# Altium PCB c2020_pcb.PcbDoc
Units mm, origin at the board's own origin, x right, y up, seen from the top; angles counter-clockwise.
Board outline 115.86 x 159.06 mm, 2 copper layers (Top Layer, Bottom Layer); 34 components, 52 nets, 174 pads, 284 vias.
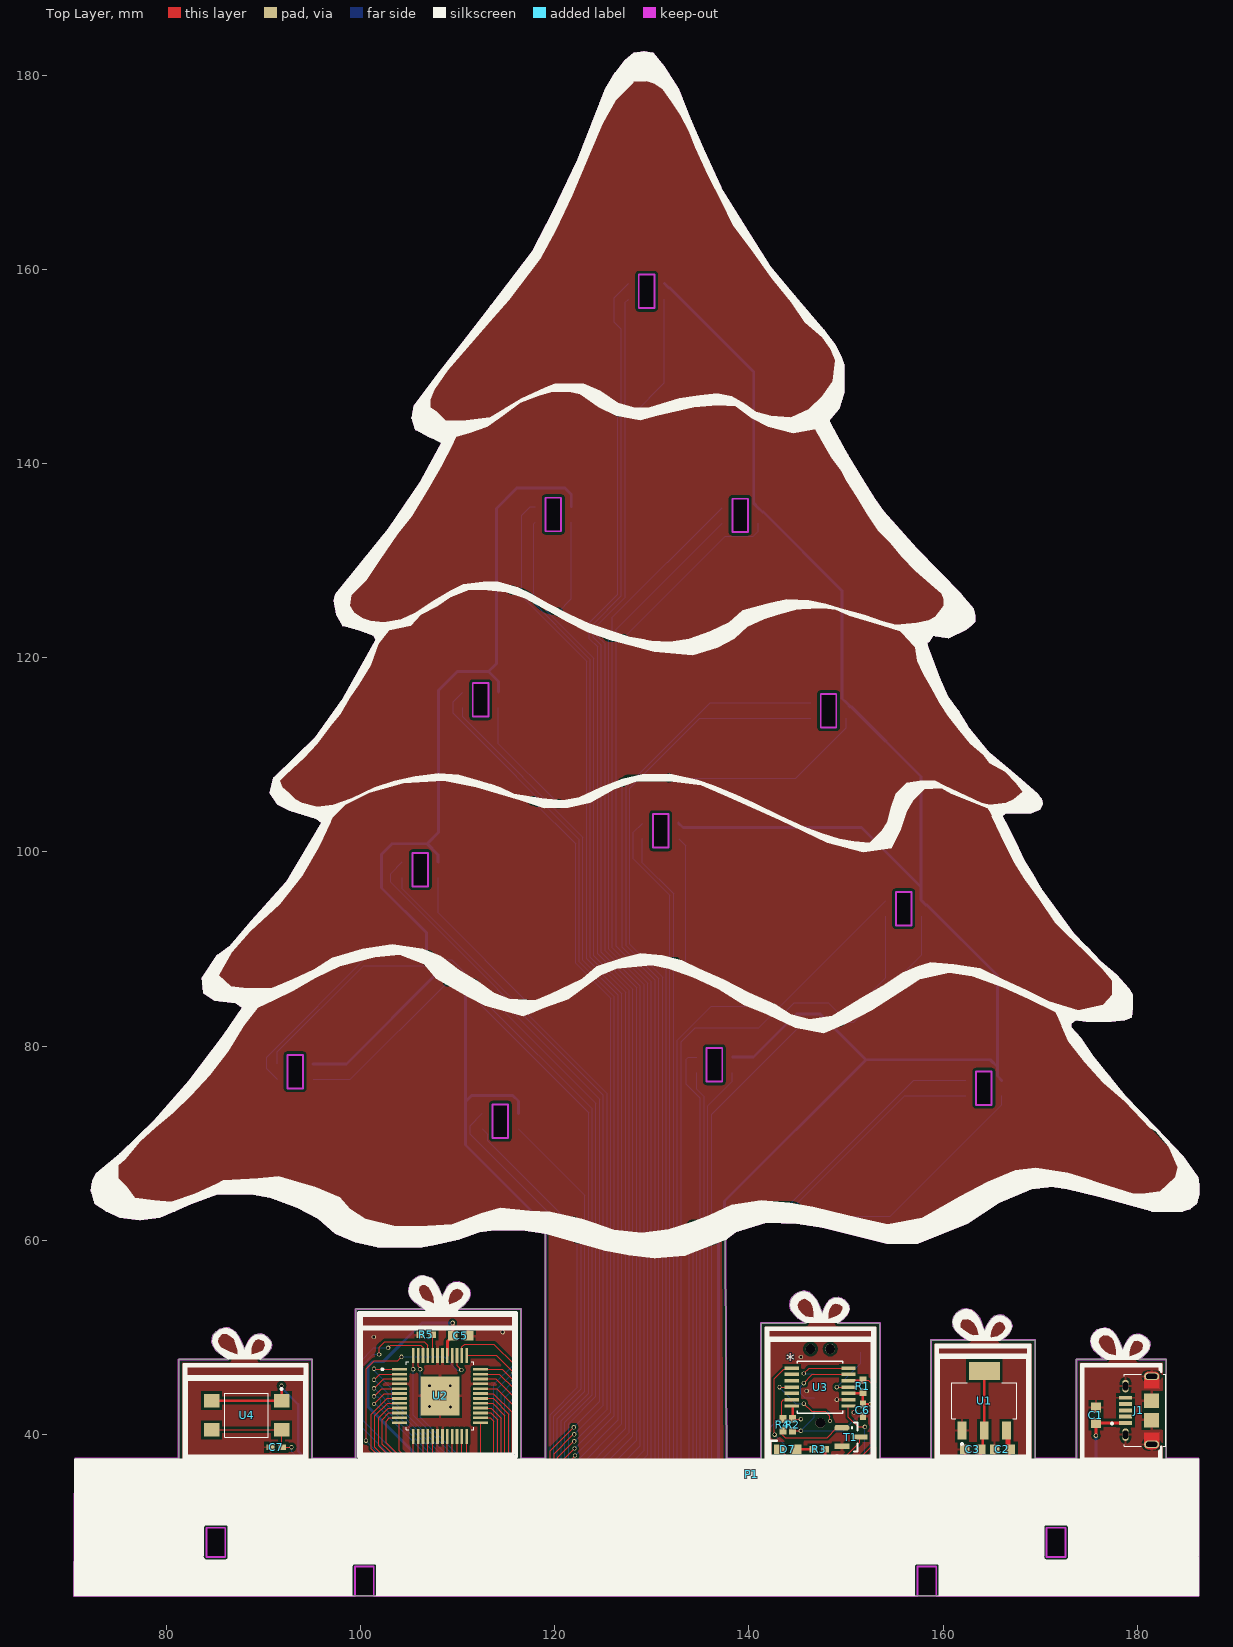
[diagram p0: Top Layer view]
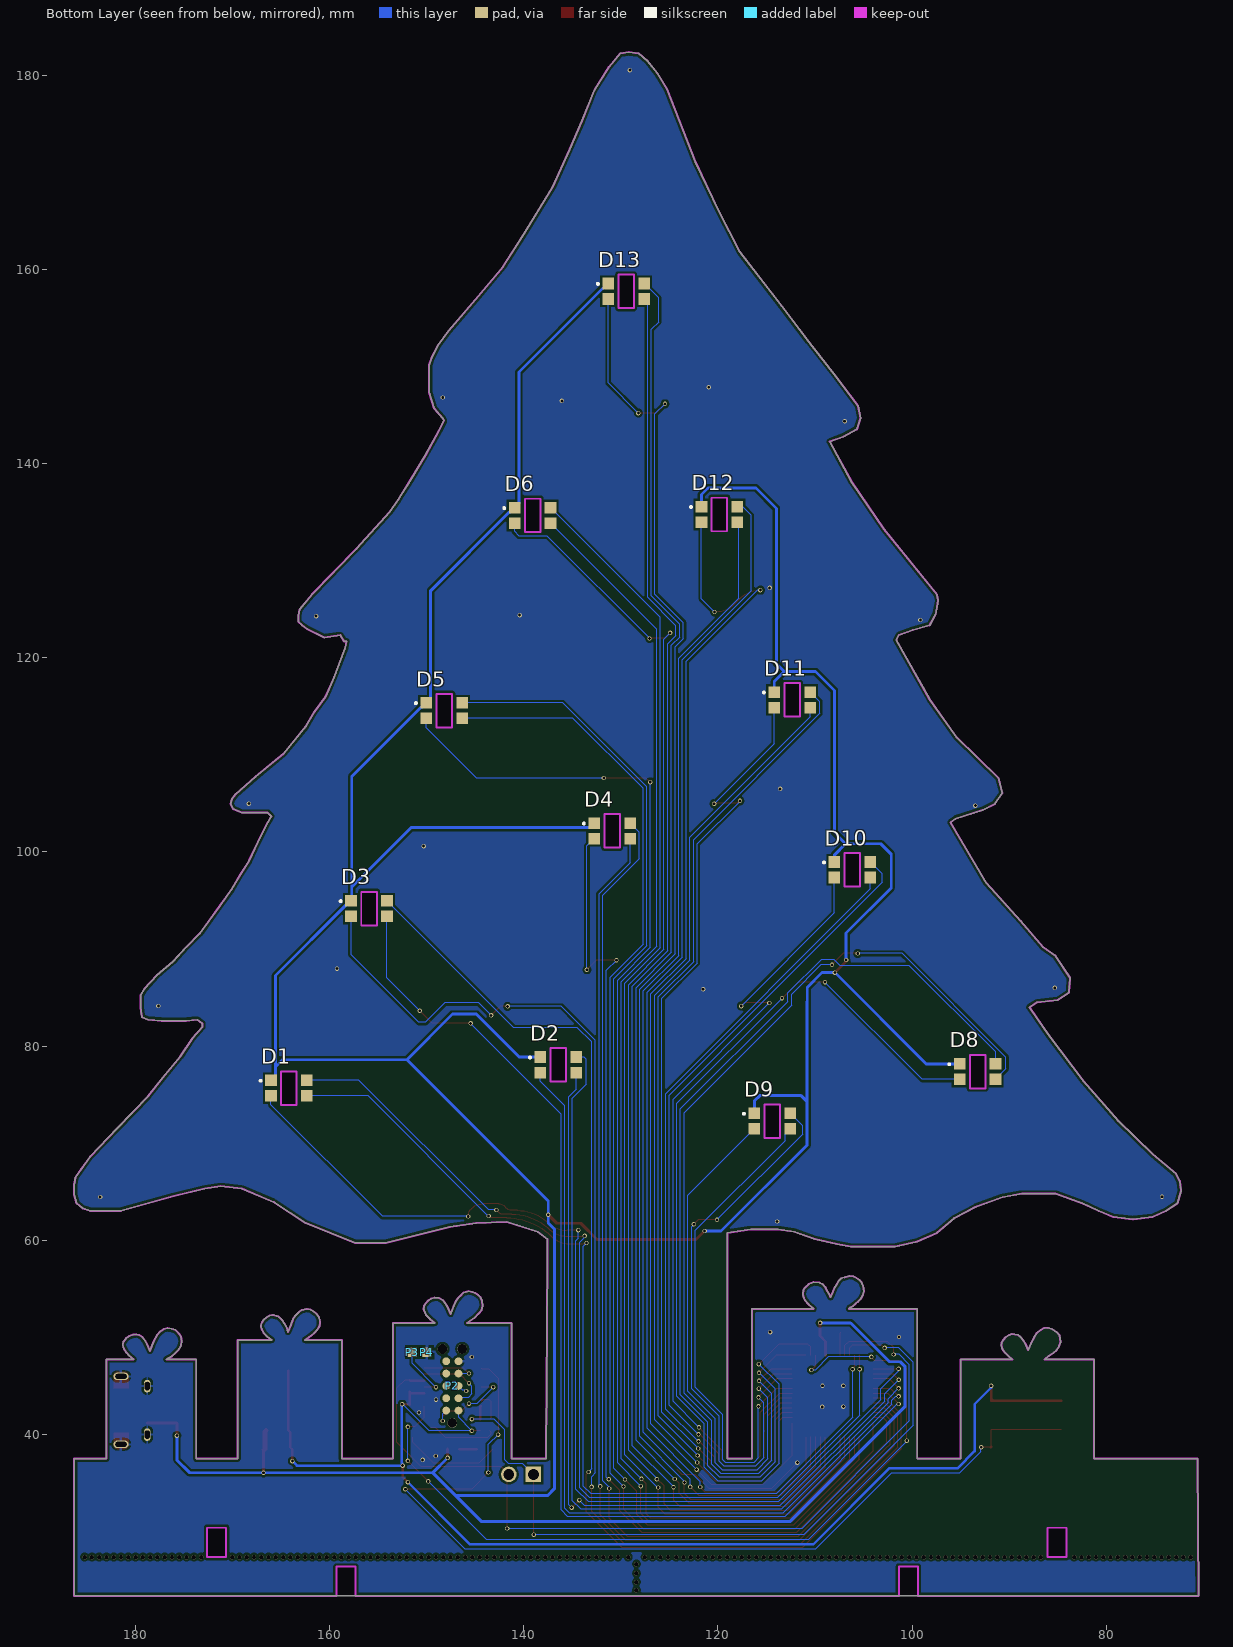
[diagram p1: Bottom Layer view, seen from below]
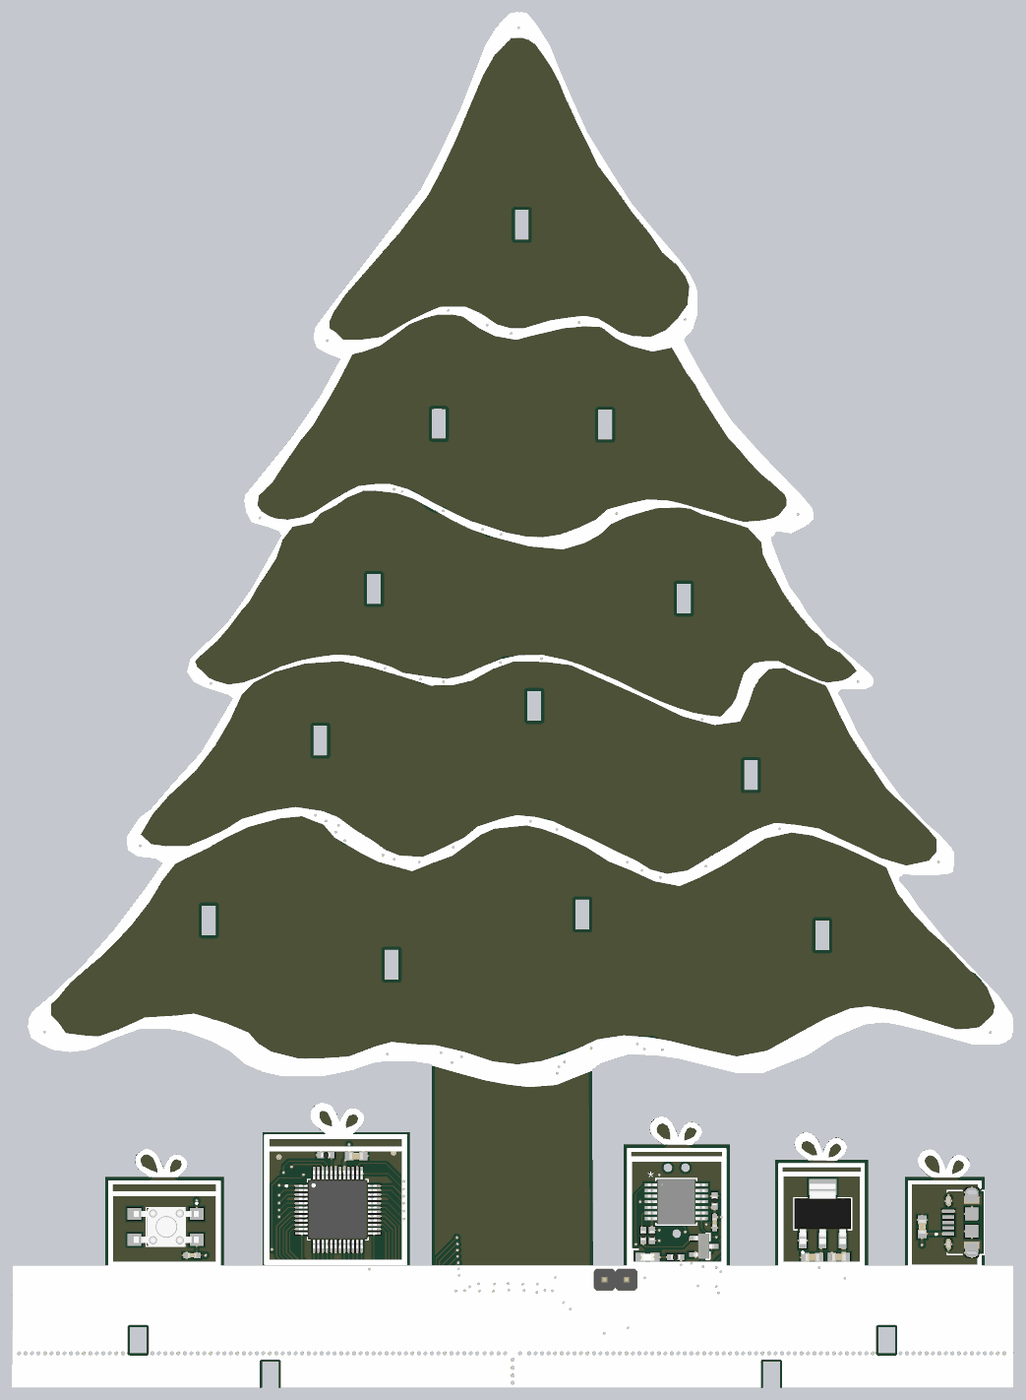
[diagram p2: 3D render of the assembled board from above, using the file's embedded part models]

## Layer stack, top to bottom
Top Solder: solder mask 0.0102, Solder Resist, Dk 3.5
Top Layer: signal copper 0.0356
Dielectric 1: dielectric 0.32, FR-4, Dk 4.8
Bottom Layer: signal copper 0.0356
Bottom Solder: solder mask 0.0102, Solder Resist, Dk 3.5

## Board outline
355 vertices, not listed, extent 70.474,23.35 186.336,182.407
cut-out: 157.35,23.35 159.3,23.35 159.3,26.375 157.35,26.375
cut-out: 99.4,23.35 101.35,23.35 101.35,26.375 99.4,26.375
cut-out: 84.1,27.35 86.05,27.35 86.05,30.375 84.1,30.375
cut-out: 170.675,27.35 172.625,27.35 172.625,30.375 170.675,30.375
cut-out: 170.675,27.35

## Design rules (kind name [scope] priority, off if disabled: settings)
Clearance [All] p1: gap=0.254 ignorepadtopadclearanceinfootprint=TRUE except(0: Arc-Hole Track-Hole SMDPad-Hole THPad-Hole Via-Hole Fill-Hole Poly-Hole Region-Hole Text-Hole; 0.127: SMDPad-SMDPad; 0.2: Arc-SMDPad Track-SMDPad)
PolygonConnect [All] p1: thpad.connectstyle=Relief thpad.reliefconductorwidth=0.254 thpad.reliefentries=4 thpad.polygonreliefangle="90 Angle" thpad.airgapwidth=0.254 smdpad.connectstyle=Relief smdpad.reliefconductorwidth=0.254 smdpad.reliefentries=4 smdpad.polygonreliefangle="90 Angle" smdpad.airgapwidth=0.254 via.connectstyle=Direct via.reliefconductorwidth=0.254 via.reliefentries=4 via.polygonreliefangle="90 Angle" via.airgapwidth=0.254
RoutingVias [All] p1: holewidth=0.3 width=0.45 viastyle="Through Hole" minholewidth=0.3 minwidth=0.45 maxholewidth=6 maxwidth=6
ShortCircuit ShortCircuit_1 [All] p1: allowed=FALSE
ShortCircuit [All] p2: allowed=FALSE
SolderMaskExpansion [All] p1: expansion=0.102
Width [All] p1: maxlimit=5 minlimit=0.127 preferedwidth=0.127 minimp=50.000000 maximp=50.000000 favimp=50.000000
29 further rules are at their usual default settings.

## Components (designator, comment, footprint, x,y, rotation, side; value= is the part's Value field where it differs from the comment)
C1 "1uF" "CAP_0603i_1608m -N" 175.75,41.966 r270 top
C2 "1uF" "CAP_0603i_1608m -N" 166.125,38.466 r0 top
C3 "1uF" "CAP_0603i_1608m -N" 163.05,38.441 r0 top
C5 "1uF" "CAP_0603i_1608m -N" 110.3,50.15 r180 top
C6 "100nF" "CAP_0402i_1005m -N" 151.75,42.466 r90 top
C7 "100nF" "CAP_0402i_1005m -N" 91.3,38.666 r0 top
D1 "156120M173000" LED_156120M173000 164.2,75.666 r180 bottom
D2 "156120M173000" LED_156120M173000 136.45,78.066 r180 bottom
D3 "156120M173000" LED_156120M173000 155.95,94.166 r180 bottom
D4 "156120M173000" LED_156120M173000 130.9,102.166 r180 bottom
D5 "156120M173000" LED_156120M173000 148.2,114.566 r180 bottom
D6 "156120M173000" LED_156120M173000 139.1,134.666 r180 bottom
D7 "Grün" *0603 144,38.466 r0 top
D8 "156120M173000" LED_156120M173000 93.25,77.366 r180 bottom
D9 "156120M173000" LED_156120M173000 114.4,72.266 r180 bottom
D10 "156120M173000" LED_156120M173000 106.15,98.166 r180 bottom
D11 "156120M173000" LED_156120M173000 112.35,115.666 r180 bottom
D12 "156120M173000" LED_156120M173000 119.85,134.766 r180 bottom
D13 "156120M173000" LED_156120M173000 129.45,157.766 r180 bottom
J1 "10118194-0001LF" AMPHENOL_10118194-0001LF 181.5,42.466 r90 top
P1 "I2C_TESTPIN" HDR1X2 139.01,35.866 r0 top
P2 "Tag-Connect TC2050-IDC-NL-No pin assigned" "TAG-CONNECT TC2050-IDC-NL 10-Pin" 146.73,42.446 r90 bottom
P3 "RCO_TESTPIN_1" Pad_0603 151.5,48.466 r180 bottom
P4 "RCO_TESTPIN" Pad_0603 150,48.466 r180 bottom
R1 "3k" "RES_0402i_1005m -N" 151.75,44.966 r270 top
R2 "3k" "RES_0402i_1005m -N" 144.5,40.966 r270 top
R3 "1.5k" "RES_0402i_1005m -N" 147.25,38.466 r0 top
R4 "200k" "RES_0402i_1005m -N" 143.5,40.966 r270 top
R5 "15k" "RES_0402i_1005m -N" 106.775,50.25 r0 top
T1 "BJT NPN" SOT23-N 150.5,39.716 r0 top
U1 "AZ1117EH-3.3TRG1" SOT230P700X180-4N 164.25,43.466 r90 top
U2 "IS31FL3236-QFLS2-TR" QFP50P900X900X160-48N 108.175,43.95 r0 top
U3 "STM32L011D4P6TR" TSSOP14 147.329,44.866 r0 top
U4 "TL3305AF260QG" SW_TL3305AF260QG 88.25,41.966 r270 top

## Footprints (in the part's own frame and the unit in brackets; to place one, negate y for a bottom-side part, rotate by r counter-clockwise, add the part's x,y. Pads: shape width x height; smd on the part's side, far side on the other; paste and mask are expansions set on the pad)
*0603 [mm]
  rect 1.1x1 smd: 1(-0.85,0) 2(0.85,0)
  silkscreen extent -1.78,-0.89 -1.14,0.89, body extent -0.8,-0.42 0.8,0.38, height 0.8
AMPHENOL_10118194-0001LF [mm]
  rect 0.4x1.35 smd: 1(-1.3,2.7) 2(-0.65,2.7) 3(0,2.7) 4(0.65,2.7) 5(1.3,2.7)
  oval 1.3x0.65 hole 0.55 slot 0.85 at 0 deg: S1(-2.5,2.7) S2(2.5,2.7)
  oval 0.775x1.55 hole 0.5 slot 1.15 at 90 deg: S3(-3.5,0) S6(3.5,0)
  rect 1.5x1.55 smd: S4(-1,0) S5(1,0)
  Top Layer region: 193 vertices and 0 holes, not listed, extent -4,-0.775 -2.3,0.78
  Top Layer region: 193 vertices and 0 holes, not listed, extent 2.3,-0.78 4,0.775
  silkscreen extent -3.7,-1.45 3.7,4.2
"CAP_0402i_1005m -N" [mm] "Chip Capacitor, Body 1.0x0.5mm, IPC Medium Density"
  rect 0.8x0.6 smd: 1(-0.6,0) 2(0.6,0)
  body extent -0.5,-0.25 0.5,0.25, height 0.5
"CAP_0603i_1608m -N" [mm] "Chip Capacitor, Body 1.6x0.8mm, IPC Medium Density"
  rect 1x1 smd: 1(-0.8,0) 2(0.8,0)
  body extent -0.8,-0.4 0.8,0.4, height 0.8
HDR1X2 [mm] "Connector; Header; 2 Position"
  rect 1.6x1.6 hole 1.1: 1(0,0)
  round 1.6 hole 1.1: 2(2.54,0)
  body extent -1.27,-1.27 3.81,1.27, height 10.3
LED_156120M173000 [mm]
  rect 1.2x1.2 smd: 1(-1.85,0.8) 2(-1.85,-0.8) 3(1.85,-0.8) 4(1.85,0.8)
  Keep-Out Layer board cut-out: -0.8,1.725 0.8,1.725 0.8,-1.725 -0.8,-1.725
  silkscreen extent -3.02,0.66 -2.82,0.86
Pad_0603 [mm]
  rect 1x1 smd: 1(0,0)
QFP50P900X900X160-48N [mm]
  rrect25% 1.56x0.28 smd: 1(-4.18,2.75) 2(-4.18,2.25) 3(-4.18,1.75) 4(-4.18,1.25) 5(-4.18,0.75) 6(-4.18,0.25) 7(-4.18,-0.25) 8(-4.18,-0.75) 9(-4.18,-1.25) 10(-4.18,-1.75) 11(-4.18,-2.25) 12(-4.18,-2.75) 25(4.18,-2.75) 26(4.18,-2.25) 27(4.18,-1.75) 28(4.18,-1.25) 29(4.18,-0.75) 30(4.18,-0.25) 31(4.18,0.25) 32(4.18,0.75) 33(4.18,1.25) 34(4.18,1.75) 35(4.18,2.25) 36(4.18,2.75)
  rrect25% 0.28x1.56 smd: 13(-2.75,-4.18) 14(-2.25,-4.18) 15(-1.75,-4.18) 16(-1.25,-4.18) 17(-0.75,-4.18) 18(-0.25,-4.18) 19(0.25,-4.18) 20(0.75,-4.18) 21(1.25,-4.18) 22(1.75,-4.18) 23(2.25,-4.18) 24(2.75,-4.18) 37(2.75,4.18) 38(2.25,4.18) 39(1.75,4.18) 40(1.25,4.18) 41(0.75,4.18) 42(0.25,4.18) 43(-0.25,4.18) 44(-0.75,4.18) 45(-1.25,4.18) 46(-1.75,4.18) 47(-2.25,4.18) 48(-2.75,4.18)
  rect 4x4 smd: 49(0,0)
  silkscreen extent -6.04,-3.5 3.5,3.5, body extent -4.5,-4.5 4.5,4.5, height 1.6
"RES_0402i_1005m -N" [mm] "Chip Resistor, Body 1.1x0.5mm, IPC Medium Density"
  rect 0.8x0.7 smd: 1(-0.6,0) 2(0.6,0)
  body extent -0.5,-0.25 0.5,0.25, height 0.3
SOT23-N [mm] "SOT23, 3-Leads, Body 3.0x2.6mm (max), Pitch 0.95mm, IPC Medium Density"
  oct 1.55x0.55 smd: 1(-0.925,0.95)
  rect 1.55x0.55 smd: 2(-0.925,-0.95) 3(0.925,0)
  silkscreen extent 0.13,-1.5 0.7,1.5, body extent -1.21,-1.45 1.21,1.45, height 0.98
SOT230P700X180-4N [mm]
  rect 1.86x0.9 smd: 1(-3.075,2.3) 2(-3.075,0) 3(-3.075,-2.3)
  rect 1.86x3.19 smd: 4(3.075,0)
  silkscreen extent -4.55,-3.35 1.85,3.35, body extent -3.48,-3.25 3.48,3.25, height 1.7
SW_TL3305AF260QG [mm]
  rect 1.4x1.6 smd: 1(-1.5,3.6) 2(-1.5,-3.6) 3(1.5,3.6) 4(1.5,-3.6)
  silkscreen extent -2.8,-2.25 2.25,3.7, body extent -2.25,-3.65 2.25,3.85, height 3.7
"TAG-CONNECT TC2050-IDC-NL 10-Pin" [mm] "Tag-Connect TC2050-IDC-NL 10-Pin No-Legs Cable with Ribbon connector."
  round 1 hole 1 unplated paste-2 mask+0: 0(-1.27,0.635) 0(6.35,-0.38) 0(6.35,1.65)
  round 0.8 smd paste-1 mask+0.102: 1(0,0) 2(1.27,0) 3(2.54,0) 4(3.81,0) 5(5.08,0) 6(5.08,1.27) 7(3.81,1.27) 8(2.54,1.27) 9(1.27,1.27) 10(0,1.27)
TSSOP14 [mil]
  rect 57.56x13.97 smd paste+0 mask+0: 1(-115,76.8) 2(-115,51.2) 3(-115,25.6) 4(-115,0) 5(-115,-25.6) 6(-115,-51.2) 7(-115,-76.8) 8(115,-76.8) 9(115,-51.2) 10(115,-25.6) 11(115,0) 12(115,25.6) 13(115,51.2) 14(115,76.8)
  silkscreen extent -93,-106 93,106, body extent -130,-101 130,101, height 47

## Part data
C1 C2 C3 C5 C6 C7: library part Cap, "capacitor"
D1 D2 D3 D4 D5 D6 D8 D9 D10 D11 D12 D13: "Red, Green, Blue (RGB) 624nm Red, 525nm Green, 470nm Blue LED Indication - Discrete 2V Red, 3.3V Green, 3.3V Blue 1206 (3216 Metric)", Package="1206 Wurth Electronics Inc.", Check_prices=https://www.snapeda.com/parts/156120M173000/Wurth%20Electronics%20Inc./view-part/3623792/?ref=eda, MF="Wurth Electronics", MP=156120M173000, Purchase-URL=https://pricing.snapeda.com/search/part/156120M173000/?ref=eda, SnapEDA_Link=https://www.snapeda.com/parts/156120M173000/Wurth%20Electronics%20Inc./view-part/3623792/?ref=snap
D7: library part LTST-C191KGKT, "LED; SMD; 0603; grün; 35mcd; 1.6x0.8x0.55mm; 130Â°; 2Ã·2.V; 20mA", Package="0603 Lite-On", Digi-Key_Part_Number=160-1446-1-ND, Digi-Key_Purchase_URL=https://www.digikey.ch/product-detail/de/lite-on-inc/LTST-C191KGKT/160-1446-1-ND/386834, MF="Lite-On Inc.", MP=LTST-C191KGKT, SnapEDA_Link=https://www.snapeda.com/parts/LTST-C191KFKT/Lite-On%20Inc./view-part/?ref=snap
J1: "USB - micro B USB 2.0 Receptacle Connector 5 Position Surface Mount, Right Angle; Through Hole", Package=None, Availability=Unavailable, MF="Amphenol ICC", MP=10118194-0001LF, Price=None, SnapEDA_Link=https://www.snapeda.com/parts/10118194-0001LF/Amphenol%20FCI/view-part/1413308/?ref=snap
P1: library part "Header 2", "Header, 2-Pin"
P2: "10-pin pogo pin programing port"
P3 P4: library part Pad, "Single Pad or Testpoint"
R1 R2 R3 R4 R5: library part Res, "Resistor"
T1: "NPN Bipolar Transistor", Note="Check footprint as it may  differ"
U1: "Linear Voltage Regulator IC 1 Output 1A SOT-223", Package="SOT-223 Diodes Inc.", Availability=Unavailable, MF="Diodes Inc.", MP=AZ1117EH-3.3TRG1, Price=None, SnapEDA_Link=https://www.snapeda.com/parts/AZ1117EH-3.3TRG1/Diodes%20Inc./view-part/482930/?ref=snap
U2: "LED Driver IC 36 Output Linear I²C Dimming 38mA 44-QFN (5x5)", Package="QFN-44 ISSI", Digi-Key_Part_Number=706-1434-1-ND, MF="ISSI, Integrated", MP=IS31FL3236-QFLS2-TR, SnapEDA_Link=https://www.snapeda.com/parts/IS31FL3236-QFLS2-TR/ISSI,%20Integrated%20Silicon%20Solution%20Inc/view-part/328010/?ref=snap
U3: "No Description Available", Built_By=EMA_UL_Team, Copyright="Copyright (C) 2018 Accelerated Designs. All rights reserved", Manufacturer_Part_Number=STM32L011D4P6TR, RefDes=RefDes, SourceLibrary=STMicroelectronics_2020-10-07, Type=DEV, Vendor=STMicroelectronics
U4: "Tactile Switch SPST-NO Top Actuated Surface Mount", Package="LQFP-48 E-Switch", Availability=Unavailable, MF=E-Switch, MP=TL3305AF260QG, Price=None, SnapEDA_Link=https://www.snapeda.com/parts/TL3305AF260QG/E-Switch/view-part/479903/?ref=snap

## Via types
v1: diameter 0.45, hole 0.45, Top Layer to Bottom Layer, tented both sides, 148 vias
v2: diameter 0.45, hole 0.3, Top Layer to Bottom Layer, tented both sides, 130 vias
v3: diameter 0.45, hole 0.3, Top Layer to Bottom Layer, 6 vias

## Nets (pads, with @x,y where several pads share a name; then routed paths per layer and width w, separated by ;. In a path a pad name is that pad's centre, name@x,y a point inside that pad or via, vN(x,y) a via of type N, cw(c..) or ccw(c..) an arc to the next point about the centre after c; other vN are vias at no path point)
+3.3: C3.2 C6.2 P2.1 R1.2 R2.2 U1.2 U1.4 U3.10 U4.1 U4.2 | length 125.9
  Top Layer w0.127: R2.2 v2(145.35,40.366)
  Top Layer w0.254: U4.2 U4.1 91.75,43.566 91.85,43.666 v2(91.85,45) ; U3.10 151.6,44.216 R1.2 C6.2 151.776,43.092 v2(152.532,43.092) ; v2(151.95,35.066) 152.482,35.598 v2(152.482,36.767) ; v2(163.85,37.241) C3.2 164.075,38.666 164.075,40.216 U1.2 U1.4
  Bottom Layer w0.127: P2.1 146.73,41.746 v2(145.35,40.366) 145.358,40.358 149.742,40.358 152.476,43.092 v2(152.532,43.092)
  Bottom Layer w0.254: v2(91.85,45) 91.85,44.8 93.55,43.1 93.55,38.266 95.325,36.491 102.36,36.491 110.185,28.666 145.55,28.666 v2(151.95,35.066) ; v2(152.532,43.092) v2(152.532,43.092) ; v2@152.556,42.96 152.556,37.015 152.52,36.979 152.52,36.804 v2(152.482,36.767) 163.376,36.767 v2(163.85,37.241)
+5: C1.2 C2.2 C5.2 D1.1 D2.1 D3.1 D4.1 D5.1 D6.1 D8.1 D9.1 D10.1 D11.1 D12.1 D13.1 J1.1 R3.2 U1.3 U2.41 | length 481.6
  Top Layer w0.3: v2(106.8,88.866) 106.8,88.716 v2(107.95,87.566) ; U2.41 108.925,49.575 C5.2 109.5,51.45 v2(109.475,51.475) ; v2(121.375,60.941) 122.25,60.066 132.465,60.066 134.14,61.741 136.604,61.741 v2(137.481,62.618) ; v2(147.85,37.566) R3.2 ; v2(166.825,36.035) 166.825,38.366 C2.2@166.875,38.416 ; v2(175.75,39.866) C1.2 J1.1
  Top Layer w0.5: U1.3 166.675,40.266 166.675,38.491 C2.2@166.75,38.416
  Bottom Layer w0.3: D8.1 98.55,78.166 v2(107.95,87.566) 109.275,87.566 110.8,86.041 110.8,84.616 110.807,84.608 110.807,74.257 ; v2(106.8,88.866) 106.8,91.641 102.15,96.291 102.15,99.766 103.225,100.841 106.85,100.841 ; D10.1 107.975,98.991 107.975,99.716 106.85,100.841 ; v2(109.475,51.475) 106.325,51.475 102.325,47.475 101.213,47.475 100.746,47.008 100.746,42.839 112.549,31.037 144.383,31.037 147.062,33.716 ; D11.1 114.2,117.55 113.165,118.585 ; D9.1 116.25,74.325 115.65,74.925 111.475,74.925 110.807,74.257 ; v2(121.375,60.941) 119.675,60.941 110.807,69.808 110.807,74.257 ; D12.1 121.7,136.825 121.025,137.5 116.084,137.5 113.979,135.395 113.979,119.399 113.165,118.585 ; D13.1 131.75,158.116 131.845,158.116 140.5,149.461 140.5,135.916 D6.1 141.4,135.016 141.495,135.016 149.6,126.911 149.6,115.816 D5.1 150.5,114.916 150.595,114.916 157.725,107.786 157.725,96.4 ; D4.1 133.2,102.516 151.609,102.516 157.725,96.4 ; D2.1 140.475,78.866 144.9,83.291 147.35,83.291 152.05,78.591 ; v2(147.85,37.566) 149.381,36.035 ; D1.1 165.6,76.916 165.6,77.85 ; v2(175.75,39.866) 175.75,37.366 174.419,36.035 v2(166.825,36.035) 149.381,36.035 ; 106.85,100.841 108,101.991 108,116.641 109.944,118.585 113.165,118.585 ; 147.062,33.716 149.381,36.035 ; 147.062,33.716 137.525,33.716 136.86,34.381 136.86,61.151 137.481,61.772 v2(137.481,62.618) 137.481,64.022 152.05,78.591 ; 152.05,78.591 164.859,78.591 165.6,77.85 ; 157.725,96.4 157.725,95.041 D3.1 158.25,94.516 158.345,94.516 165.6,87.261 165.6,77.85
GND: C1.1 C2.1 C3.1 C5.1 C6.1 C7.1 J1.5 J1.S1 J1.S2 J1.S3 J1.S4 J1.S5 J1.S6 P2.3 P2.5 P4.1 R5.1 T1.2 U1.1 U2.4 U2.18 U2.19 U2.33 U2.40 U2.42 U2.43 U2.49 U3.9 | length 15.3
  Top Layer w0.127: v2(111.825,37.075) 114.485,34.416 120.907,34.416 122.315,35.823 123.682,35.823 124.2,36.341
  Bottom Layer w0.127: v2(145.95,44.466) 146.012,44.528 146.272,44.528 P2.3
  other v2: 150.425,37.366 149.075,37.766 150.8,42.241 149.05,43.566 145.35,47.966 113.9,61.925 183.65,64.45 74.25,64.475 177.65,84.125 121.525,85.85 85.3,86 159.25,87.975 150.325,100.6 93.475,104.775 168.325,104.975 113.6,106.5 99.15,123.9 161.4,124.3 140.425,124.4 114.675,127.2 106.95,144.375 136.075,146.475 148.35,146.825 120.95,147.875 129.075,180.55
  other v3: 109.25,42.825 107.075,42.85 107.075,45 109.225,45 101.35,50.025 114.625,50.525
NetC7_2: C7.2 U3.1 U4.3 U4.4 | length 98.1
  Top Layer w0.127: U4.4 U4.3 C7.2@91.85,38.716 ; C7.2 v2(92.875,38.666) ; v2(142.65,39.966) 142.607,40.009 142.607,45.724 143.587,46.703 144.294,46.703 U3.1 ; v2(143.65,36.066) 145.374,34.342 v2(152.207,34.342)
  Top Layer w0.254: C7.2@91.85,38.716 C7.2
  Bottom Layer w0.127: v2@92.913,38.628 92.913,38.185 95.115,35.983 102.15,35.983 109.975,28.158 146.023,28.158 v2(152.207,34.342) ; v2(142.65,39.966) 143.65,38.966 v2(143.65,36.066)
  Bottom Layer w0.254: v2(92.875,38.666) v2@92.913,38.628
NetD1_2: D1.2 U2.1 | length 108.6
  Top Layer w0.127: v2(101.38,46.752) 101.407,46.725 103.97,46.725 U2.1 ; v2(134.375,61.041) 135.534,61.041 135.609,60.966 ccw(c135.609,63.506) 137.405,61.71 cw(c140.679,58.436) 140.679,63.066 141.2,63.066 ccw(c141.2,63.911) 141.797,63.313 141.975,63.491 cw(c142.579,62.887) 142.579,63.741 144.228,63.741 cw(c144.228,62.119) 145.375,63.266 145.389,63.252 cw(c144.578,62.441) v2(145.725,62.441)
  Bottom Layer w0.127: v2(101.38,46.752) 101.38,46.545 103.218,44.707 103.218,43.582 113.772,33.028 133.307,33.028 134.63,34.351 134.63,59.943 134.375,60.197 v2(134.375,61.041) ; v2(145.725,62.441) 154.55,62.441 166.05,73.941 D1.2
NetD1_3: D1.3 U2.47 | length 97.8
  Top Layer w0.127: U2.47 105.925,46.987 106.125,46.787 v2(106.125,46.7) ; v2(133.55,59.716) 133.675,59.591 135.323,59.591 ccw(c135.323,62.131) 137.119,60.335 137.186,60.402 cw(c141.772,55.815) 141.772,62.302 143.44,62.302 v2(143.63,62.491)
  Bottom Layer w0.127: v2(106.125,46.7) 106.125,41.753 114.005,33.874 133.075,33.874 133.868,34.666 133.868,59.398 v2(133.55,59.716) ; v2(143.63,62.491) 143.665,62.491 156.039,74.866 D1.3
NetD1_4: D1.4 U2.48 | length 100.1
  Top Layer w0.127: v2(105.4,46.7) 105.413,46.713 105.413,48.118 U2.48 ; v2(133.731,60.443) 133.806,60.368 135.656,60.368 ccw(c135.656,62.651) 137.27,61.036 cw(c141.245,57.061) 141.245,62.683 142.261,62.683 ccw(c142.261,62.998) 142.484,62.775 v2(142.825,63.116)
  Bottom Layer w0.127: v2(105.4,46.7) 105.4,41.939 113.873,33.466 133.206,33.466 134.249,34.508 134.249,59.785 133.731,60.302 v2(133.731,60.443) ; v2(142.825,63.116) 143.637,63.116 156.987,76.466 D1.4
NetD2_2: D2.2 U2.5 | length 88.7
  Top Layer w0.127: v2(101.38,43.902) 102.178,44.7 U2.5
  Bottom Layer w0.127: v2(101.38,43.902) 101.423,43.86 101.741,43.86 102.075,43.525 102.075,43.109 113.299,31.885 135.292,31.885 135.773,32.366 135.773,73.864 138.3,76.391 D2.2
NetD2_3: D2.3 U2.2 | length 88.2
  Top Layer w0.127: v2(101.375,45.625) 101.95,46.2 U2.2 ; v2(134.281,33.217) 134.306,33.217 v2(135.081,32.442)
  Bottom Layer w0.127: v2(101.375,45.625) 102.837,44.163 102.837,43.425 113.615,32.647 133.712,32.647 v2(134.281,33.217) ; D2.3 134.625,77.241 134.625,75.555 135.392,74.788 135.392,32.752 v2(135.081,32.442)
NetD2_4: D2.4 U2.3 | length 89.6
  Top Layer w0.127: v2(101.38,44.727) 102.353,45.7 U2.3
  Bottom Layer w0.127: v2(101.38,44.727) 101.412,44.727 102.456,43.683 102.456,43.267 113.457,32.266 134.098,32.266 135.011,33.179 135.011,74.63 133.55,76.091 133.55,78.641 133.775,78.866 D2.4
NetD3_2: D3.2 U2.8 | length 127.2
  Top Layer w0.127: U2.8 102.786,43.2 101.474,41.887 101.474,38.681 111.454,28.701 129.635,28.701 133.018,32.084 v2(133.018,34.584) ; v2(141.675,84.091) 142.45,84.091 v2(143.375,83.166)
  Bottom Layer w0.127: v2(133.018,34.584) 133.018,35.629 132.626,36.021 132.626,80.581 136.136,84.091 v2(141.675,84.091) ; v2(143.375,83.166) 144.65,84.441 148.15,84.441 150.15,82.441 150.825,82.441 157.8,89.416 D3.2
NetD3_3: D3.3 U2.6 | length 113.8
  Top Layer w0.127: v2(101.38,43.127) 102.453,44.2 U2.6 ; v2(145.475,82.341) 149.425,82.341 v2(150.725,83.641)
  Bottom Layer w0.127: v2(101.38,43.127) 101.518,43.127 113.141,31.504 135.45,31.504 136.154,32.208 136.154,72.995 145.475,82.316 v2(145.475,82.341) ; v2(150.725,83.641) 154.1,87.016 D3.3
NetD3_4: D3.4 U2.7 | length 121.1
  Top Layer w0.127: U2.7 102.747,43.7 101.093,42.045 101.093,38.524 111.297,28.32 129.853,28.32 133.56,32.026 133.56,35.881 v2(133.325,36.116)
  Bottom Layer w0.127: v2(133.325,36.116) 133.007,36.434 133.007,80.424 134.475,81.891 141.025,81.891 D3.4
NetD4_2: D4.2 U2.11 | length 111
  Top Layer w0.127: U2.11 102.95,41.7 102.617,41.367 102.617,39.155 103.122,38.649 111.928,29.844 127.816,29.844 130.106,32.133 130.106,34.222 v2(131.25,35.366) ; v2(130.45,88.841) 132.525,88.841 v2(133.5,87.866)
  Bottom Layer w0.127: v2(130.45,88.841) 131.483,87.808 131.483,35.6 v2(131.25,35.366) ; D4.2 133.5,100.616 v2(133.5,87.866)
NetD4_3: D4.3 U2.9 | length 111.9
  Top Layer w0.127: U2.9 102.825,42.7 101.855,41.729 101.855,38.839 111.612,29.082 129.477,29.082 132.125,31.73 v2(132.125,34.641)
  Bottom Layer w0.127: D4.3 129.025,101.341 129.025,98.891 132.245,95.671 132.245,34.761 v2(132.125,34.641)
NetD4_4: D4.4 U2.10 | length 112.1
  Top Layer w0.127: U2.10 102.911,42.2 102.236,41.524 102.236,38.997 102.741,38.491 111.77,29.463 129.319,29.463 131.2,31.344 v2(131.2,34.416)
  Bottom Layer w0.127: D4.4 128.1,102.016 128.1,99.277 131.864,95.513 131.864,35.213 131.2,34.549 v2(131.2,34.416)
NetD5_2: D5.2 U2.14 | length 131.5
  Top Layer w0.127: U2.14 105.925,37.463 112.401,30.987 127.057,30.987 127.95,31.88 v2(127.95,34.666) ; v2(126.975,107.191) 127.4,107.616 v2(131.75,107.616)
  Bottom Layer w0.127: v2(126.975,107.191) 126.957,107.173 126.957,90.181 130.34,86.798 130.34,37.056 v2(127.95,34.666) ; v2(131.75,107.616) 144.85,107.616 150.05,112.816 D5.2
NetD5_3: D5.3 U2.12 | length 130.7
  Top Layer w0.127: U2.12 103.995,38.315 112.086,30.225 127.659,30.225 129.725,32.291 v2(129.725,34.616)
  Bottom Layer w0.127: v2(129.725,34.616) 131.102,35.993 131.102,87.114 127.719,90.497 127.719,106.546 134.939,113.766 D5.3
NetD5_4: D5.4 U2.13 | length 128.5
  Top Layer w0.127: U2.13 105.425,37.424 112.243,30.606 127.215,30.606 128.364,31.755 128.364,34.13 v2(129.575,35.341)
  Bottom Layer w0.127: v2(129.575,35.341) 130.721,36.488 130.721,86.956 127.338,90.339 127.338,106.704 136,115.366 D5.4
NetD6_2: D6.2 U2.17 | length 137.6
  Top Layer w0.127: U2.17 107.425,37.579 112.875,32.13 124.839,32.13 125.543,32.834 125.543,34.676 126.233,35.366 v2(126.3,35.366) ; v2(124.925,122.566) 125.5,121.991 v2(127.05,121.991)
  Bottom Layer w0.127: v2(124.925,122.566) 125.563,121.928 125.563,89.959 129.197,86.324 129.197,38.363 126.3,35.466 v2(126.3,35.366) ; v2(127.05,121.991) 137.575,132.516 140.45,132.516 140.95,133.016 D6.2
NetD6_3: D6.3 U2.15 | length 135.1
  Top Layer w0.127: U2.15 106.425,37.502 112.559,31.368 126.899,31.368 127.371,31.84 127.371,34.897 v2(127.881,35.407)
  Bottom Layer w0.127: v2(127.881,35.407) 127.881,35.422 129.959,37.5 129.959,86.64 126.325,90.275 126.325,122.941 D6.3
NetD6_4: D6.4 U2.16 | length 134.8
  Top Layer w0.127: U2.16 106.925,37.54 112.717,31.749 125.432,31.749 126.15,32.466 v2(126.15,34.516)
  Bottom Layer w0.127: v2(126.15,34.516) 126.217,34.516 129.578,37.877 129.578,86.482 125.944,90.117 125.944,124.16 D6.4
NetD7_1: D7.1 T1.3 | length 10.3
  Top Layer w0.127: D7.1 143.2,38.466 144.642,37.023 149.255,37.023 151.425,39.193 T1.3
NetD7_2: D7.2 R3.1 | length 1.8
  Top Layer w0.254: D7.2 R3.1
NetD8_2: D8.2 U2.38 | length 104.5
  Top Layer w0.127: v2(108.975,86.591) 111.75,86.591 v2(113.4,84.941) ; U2.38 110.425,49 110.725,49.3 113.725,49.3 v2(115.8,47.225)
  Bottom Layer w0.127: D8.2 98.95,76.566 v2(108.975,86.591) ; v2(113.4,84.941) 124.244,74.097 124.244,43.911 121.413,41.08 121.413,36.603 119.988,35.178 115.538,35.178 113.707,37.008 113.707,45.132 v2(115.8,47.225)
NetD8_3: D8.3 U2.36 | length 105
  Top Layer w0.127: v2(105.6,89.541) 107.075,89.541 v2(108.25,88.366) ; U2.36 114.575,46.7 v2(115.775,45.5)
  Bottom Layer w0.127: D8.3 90.325,77.641 90.325,78.855 101.011,89.541 v2(105.6,89.541) ; v2(108.25,88.366) 109.386,88.366 112.415,85.337 112.415,84.201 123.482,73.134 123.482,44.227 120.651,41.396 120.651,36.918 119.672,35.94 115.854,35.94 114.469,37.324 114.469,44.194 v2(115.775,45.5)
NetD8_4: D8.4 U2.37 | length 106.1
  Top Layer w0.127: U2.37 113.97,48.13 v2(115.775,46.325)
  Bottom Layer w0.127: D8.4 91.4,79.391 100.3,88.291 107.408,88.291 108.025,88.909 109.383,88.909 112.796,85.495 112.796,84.587 123.863,73.52 123.863,44.069 121.032,41.238 121.032,36.76 119.83,35.559 115.696,35.559 114.088,37.166 114.088,44.688 115.725,46.325 v2(115.775,46.325)
NetD9_2: D9.2 U2.35 | length 56.3
  Top Layer w0.127: U2.35 114.3,46.2 v2(115.8,44.7)
  Bottom Layer w0.127: v2(115.8,44.7) 114.85,43.75 114.85,37.482 116.011,36.321 119.515,36.321 120.27,37.076 120.27,41.586 123.101,44.418 123.101,64.615 D9.2
NetD9_3: D9.3 U2.32 | length 52.8
  Top Layer w0.127: U2.32 114,44.7 v2(115.825,42.875)
  Bottom Layer w0.127: D9.3 113.087,70.929 113.087,70.262 122.339,61.009 122.339,44.857 119.508,42.025 119.508,37.392 119.199,37.083 116.327,37.083 115.85,37.56 115.85,42.85 v2(115.825,42.875)
NetD9_4: D9.4 U2.34 | length 59.3
  Top Layer w0.127: U2.34 113.925,45.7 v2(115.825,43.8) ; v2(120.1,62.091) 122.025,62.091 v2(122.475,61.641)
  Bottom Layer w0.127: D9.4 111.275,71.791 111.275,70.916 v2(120.1,62.091) ; v2(115.825,43.8) 115.282,43.257 115.282,40.344 115.307,40.319 115.307,37.563 116.169,36.702 119.357,36.702 119.889,37.234 119.889,41.867 122.72,44.699 122.72,61.396 v2(122.475,61.641)
NetD10_2: D10.2 U2.31 | length 86.4
  Top Layer w0.127: U2.31 113.678,44.2 115.63,42.248 115.63,37.78 116.327,37.083 119.199,37.083 119.55,37.434 119.55,38.311 v2(121.956,40.717) ; v2(114.7,84.441) 117.275,84.441 v2(117.6,84.116)
  Bottom Layer w0.127: D10.2 108,93.716 v2(117.6,84.116) ; v2(114.7,84.441) 124.625,74.516 124.625,43.387 v2(121.956,40.717)
NetD10_3: D10.3 U2.29 | length 84.9
  Top Layer w0.127: U2.29 113.6,43.2 114.868,41.932 114.868,37.464 116.011,36.321 119.515,36.321 120.312,37.118 120.312,37.628 121.9,39.216 121.955,39.216 v2(122.006,39.267)
  Bottom Layer w0.127: D10.3 104.3,96.191 125.387,75.104 125.387,42.607 122.048,39.267 v2(122.006,39.267)
NetD10_4: D10.4 U2.30 | length 86.8
  Top Layer w0.127: U2.30 113.639,43.7 115.249,42.09 115.249,37.622 116.169,36.702 119.357,36.702 119.931,37.276 119.931,38.022 121.795,39.886 121.813,39.886 121.918,39.992 v2(122.006,39.992)
  Bottom Layer w0.127: D10.4 103.075,97.741 103.075,96.877 125.006,74.946 125.006,42.993 v2(122.006,39.992)
NetD11_2: D11.2 U2.28 | length 103.1
  Top Layer w0.127: U2.28 112.38,42.675 113.478,42.675 114.487,41.666 114.487,37.306 115.854,35.94 119.672,35.94 120.693,36.96 120.693,37.204 v2(122.031,38.542) ; v2(117.725,105.266) 117.763,105.266 118.038,104.991 120.375,104.991 v2(120.4,104.966)
  Bottom Layer w0.127: D11.2 114.2,111.166 v2(120.4,104.966) ; v2(117.725,105.266) 117.725,105.241 122.134,100.832 122.134,88.539 125.768,84.904 125.768,42.263 122.048,38.542 v2(122.031,38.542)
NetD11_3: D11.3 U2.26 | length 102.1
  Top Layer w0.127: U2.26 113.375,41.7 113.725,41.35 113.725,36.99 115.538,35.178 120.216,35.178 v2(122.131,37.092)
  Bottom Layer w0.127: D11.3 110.5,113.916 122.896,101.52 122.896,88.854 126.53,85.22 126.53,41.492 v2(122.131,37.092)
NetD11_4: D11.4 U2.27 | length 103.6
  Top Layer w0.127: U2.27 113.414,42.2 114.106,41.508 114.106,37.148 115.696,35.559 119.83,35.559 121.074,36.802 v2(122.088,37.816)
  Bottom Layer w0.127: D11.4 109.525,115.491 109.525,114.268 122.515,101.278 122.515,88.696 126.149,85.062 126.149,41.886 122.088,37.825 v2(122.088,37.816)
NetD12_2: D12.2 U2.25 | length 127.8
  Top Layer w0.127: U2.25 112.355,37.822 115.38,34.797 120.631,34.797 v2(122.2,36.366) ; v2(115.625,126.966) 115.798,126.966 cw(c115.798,124.426) 117.594,126.222 118.356,125.46 ccw(c120.152,127.256) 120.152,124.716 v2(120.35,124.716)
  Bottom Layer w0.127: v2(115.625,126.966) 115.955,126.966 123.277,119.644 123.277,89.012 126.911,85.378 126.911,41.077 v2(122.2,36.366) ; v2(120.35,124.716) 121.7,126.066 D12.2
NetD12_3: D12.3 U2.23 | length 122.6
  Top Layer w0.127: U2.23 110.425,36.734 113.506,33.654 121.913,33.654 v2(122.85,34.591)
  Bottom Layer w0.127: D12.3 117.85,133.816 117.85,126.149 124.039,119.96 124.039,89.328 127.673,85.693 127.673,40.197 122.85,35.374 v2(122.85,34.591)
NetD12_4: D12.4 U2.24 | length 123.8
  Top Layer w0.127: U2.24 110.925,36.841 113.731,34.035 121.294,34.035 v2(121.825,34.566)
  Bottom Layer w0.127: D12.4 117.45,135.566 116.575,134.691 116.575,126.885 123.658,119.802 123.658,89.17 127.292,85.535 127.292,40.601 121.825,35.133 v2(121.825,34.566)
NetD13_2: D13.2 U2.22 | length 152.1
  Top Layer w0.127: U2.22 109.925,36.696 113.348,33.273 122.807,33.273 123.45,33.916 v2(123.45,35.041) ; v2(125.45,146.166) 126.4,145.216 v2(128.2,145.216)
  Bottom Layer w0.127: v2(123.45,35.041) 123.45,35.174 128.054,39.778 128.054,85.851 124.42,89.485 124.42,121.118 123.563,121.975 123.563,123.632 126.488,126.557 126.488,145.128 v2(125.45,146.166) ; v2(128.2,145.216) 131.3,148.316 D13.2
NetD13_3: D13.3 U2.20 | length 149.4
  Top Layer w0.127: U2.20 108.925,36.618 113.032,32.511 123.894,32.511 124.575,33.191 v2(124.575,34.541)
  Bottom Layer w0.127: v2@124.625,34.643 128.816,38.835 128.816,86.167 125.182,89.801 125.182,121.434 124.325,122.291 124.325,123.316 127.25,126.241 127.25,156.616 D13.3
NetD13_4: D13.4 U2.21 | length 150.1
  Top Layer w0.127: U2.21 109.425,36.657 113.19,32.892 122.964,32.892 123.993,33.92 123.993,34.934 v2(124.45,35.391)
  Bottom Layer w0.127: v2(124.45,35.391) 128.435,39.376 128.435,86.009 124.801,89.643 124.801,121.276 123.944,122.133 123.944,123.474 126.869,126.399 126.869,153.847 126.125,154.591 126.125,157.091 D13.4
NetP1_1: P1.1 R2.1 U2.46 U3.7 | length 77.5
  Top Layer w0.127: v2(102.825,48.9) 103.1,49.175 106.169,49.175 106.425,48.919 U2.46 ; v2(138.975,29.666) 138.975,35.501 138.95,35.526 139.15,35.726 P1.1 ; R2.1 v2(145.35,41.566)
  Top Layer w0.254: U3.7 144.45,42.916 144.5,42.865 R2.1
  Bottom Layer w0.127: v2(102.825,48.9) 101.361,48.9 99.885,47.425 99.885,40.931 111.15,29.666 v2(138.975,29.666) ; P1.1 140.128,36.984 141.568,36.984 141.95,37.366 141.95,40.466 143.05,41.566 v2(145.35,41.566)
NetP1_2: P1.2 R1.1 U2.45 U3.12 | length 88.5
  Top Layer w0.127: v2(101.9,48.225) 101.9,48.975 102.481,49.556 106.544,49.556 106.925,49.175 U2.45 ; v2(141.725,30.291) 141.725,35.691 P1.2 142.326,36.642 150.559,36.642 153.075,39.158 153.075,44.782 152.291,45.566 R1.1
  Top Layer w0.254: U3.12 151.7,45.516 R1.1
  Bottom Layer w0.127: v2(101.9,48.225) 101.302,48.225 100.266,47.19 100.266,41.388 111.364,30.291 v2(141.725,30.291)
NetP2_2: P2.2 U3.13 | length 7.8
  Top Layer w0.127: v2(145.65,45.266) 146.551,46.167 U3.13
  Bottom Layer w0.127: v2(145.65,45.266) 145.35,44.966 145.35,44.166 145.75,43.766 146.68,43.766 P2.2
NetP2_4: P2.4 U3.14 | length 5.9
  Top Layer w0.127: v2(145.65,46.266) 146.201,46.817 U3.14
  Bottom Layer w0.127: v2(145.65,46.266) 145.655,46.261 146.725,46.261 P2.4
NetP2_10: P2.10 U3.4 | length 9.4
  Top Layer w0.127: v2(143.15,44.866) U3.4 ; v2(145.65,43.166) 146.45,42.366 147.85,42.366 148.35,41.866 v2(148.35,41.366)
  Bottom Layer w0.127: v2(143.15,44.866) 144.85,43.166 v2(145.65,43.166) ; P2.10 148.35,42.096 v2(148.35,41.366)
NetP3_1: P3.1 U3.11 | length 5.8
  Top Layer w0.127: v2(149.05,44.866) U3.11
  Bottom Layer w0.127: v2(149.05,44.866) 151.5,47.316 P3.1
NetR4_1: R4.1 U3.6 | length 3.1
  Top Layer w0.127: R4.1 143.359,41.707 143.359,43.376 143.55,43.566 U3.6@144.408,43.566
  Top Layer w0.254: U3.6@144.358,43.515 U3.6
NetR4_2: R4.2 T1.1 | length 7.2
  Top Layer w0.127: R4.2 143.35,40.216 143.35,40.066 143.768,39.648 148.057,39.648 149.075,40.666 T1.1
NetR5_2: R5.2 U2.44 | length 2.4
  Top Layer w0.127: R5.2@107.375,50.5 107.425,50.45 U2.44
NetU2_39: U2.39 U3.8 | length 85.8
  Top Layer w0.127: v2(100.55,39.35) 100.55,46.767 101.383,47.6 103.825,47.6 v2(104.2,47.975) ; U2.39 109.925,47.075 v2(110.375,46.625) ; v2(149.85,35.15) 149.85,35.166 v2(151.95,37.266) ; U3.8 150.25,41.766 151.25,40.766 v2(151.95,40.766)
  Bottom Layer w0.127: v2(100.55,39.35) 100.55,39.266 110.693,29.124 143.823,29.124 v2(149.85,35.15) ; v2(104.2,47.975) 108.625,47.975 109.975,46.625 v2(110.375,46.625) ; v2(151.95,37.266) v2(151.95,40.766)
pads on no net: J1.2 J1.3 J1.4 P2.0 P2.6 P2.7 P2.8 P2.9 U3.2 U3.3 U3.5
copper on no net:
  other v1: 128.4,23.95 128.4,24.775 128.4,25.675 128.4,26.625 71.3,27.35 72.05,27.35 72.8,27.35 73.55,27.35 74.3,27.35 75.05,27.35 75.8,27.35 76.55,27.35 77.3,27.35 78.05,27.35 78.8,27.35 79.55,27.35 80.3,27.35 81.05,27.35 81.8,27.35 82.55,27.35 83.3,27.35 86.725,27.35 87.475,27.35 88.225,27.35 88.975,27.35 89.725,27.35 90.475,27.35 91.225,27.35 91.975,27.35 92.725,27.35 93.475,27.35 94.3,27.35 95.05,27.35 95.8,27.35 96.55,27.35 97.3,27.35 98.05,27.35 98.8,27.35 99.55,27.35 100.3,27.35 101.05,27.35 101.8,27.35 102.55,27.35 103.3,27.35 104.05,27.35 104.8,27.35 105.55,27.35 106.3,27.35 107.05,27.35 107.8,27.35 108.55,27.35 109.3,27.35 110.05,27.35 110.8,27.35 111.55,27.35 112.3,27.35 113.05,27.35 113.8,27.35 114.55,27.35 115.3,27.35 116.05,27.35 116.8,27.35 117.55,27.35 118.3,27.35 119.05,27.35 119.8,27.35 120.55,27.35 121.3,27.35 122.05,27.35 122.8,27.35 123.55,27.35 124.3,27.35 125.15,27.35 125.95,27.35 126.75,27.35 127.525,27.35 129.25,27.35 130.3,27.35 131.05,27.35 131.8,27.35 132.55,27.35 133.3,27.35 134.05,27.35 134.8,27.35 135.55,27.35 136.3,27.35 137.05,27.35 137.8,27.35 138.55,27.35 139.3,27.35 140.05,27.35 140.8,27.35 141.55,27.35 142.3,27.35 143.05,27.35 143.8,27.35 144.55,27.35 145.3,27.35 146.05,27.35 146.8,27.35 147.55,27.35 148.3,27.35 149.05,27.35 149.8,27.35 150.55,27.35 151.3,27.35 152.05,27.35 152.8,27.35 153.55,27.35 154.3,27.35 155.05,27.35 155.8,27.35 156.55,27.35 157.3,27.35 158.05,27.35 158.8,27.35 159.55,27.35 160.3,27.35 161.05,27.35 161.8,27.35 162.55,27.35 163.3,27.35 164.05,27.35 164.8,27.35 165.55,27.35 166.3,27.35 167.05,27.35 167.8,27.35 168.55,27.35 169.3,27.35 170.05,27.35 173.25,27.35 174,27.35 174.75,27.35 175.5,27.35 176.25,27.35 177,27.35 177.75,27.35 178.5,27.35 179.25,27.35 180,27.35 180.75,27.35 181.5,27.35 182.25,27.35 183,27.35 183.75,27.35 184.5,27.35 185.25,27.35

## Polygon pours and split planes (outlines as drawn)
no net on Top Overlay "Top Overlay-No Net" (solid, pour order 6): 109.925,52.7 110.2,52.975 110.75,53.5 111.075,53.9 111.225,54.275 111.225,54.675 111.175,54.925 111,55.175 110.75,55.375 110.55,55.55 110.15,55.675 109.7,55.675 109.375,55.575 109.075,55.3 108.875,55.025 108.6,54.525 108.4,54.125 108.125,54.775 107.975,55.125 107.825,55.375 107.625,55.725 107.325,56.075 107,56.175 106.55,56.325 106.2,56.325 105.85,56.175 105.525,55.975 105.3,55.75 105.125,55.5 105,55.097 104.975,54.7 105.075,54.3 105.3,53.925 105.575,53.65 105.975,53.375 106.35,53.075 106.75,52.7
no net on Top Overlay "Top Overlay-No Net" (solid, pour order 5): 165.907,49.622 166.212,49.886 166.516,50.124 166.767,50.408 166.965,50.719 167.071,51.083 167.045,51.361 166.912,51.632 166.608,51.949 166.265,52.174 165.967,52.253 165.484,52.2 165.088,51.962 164.79,51.606 164.572,51.235 164.4,50.825 164.301,50.547 164.109,51.037 163.937,51.447 163.673,52.015 163.329,52.451 162.945,52.769 162.43,52.914 162.152,52.875 161.729,52.703 161.372,52.399 161.213,52.213 161.107,52.028 161.041,51.817 161.002,51.526 161.081,51.116 161.2,50.878 161.385,50.627 161.755,50.256 162.099,49.992 162.628,49.648
no net on Top Overlay "Top Overlay-No Net" (solid, pour order 4): 70.574,37.5 70.503,37.429 70.503,27.463 186.336,27.462 186.336,37.5
no net on Top Overlay "Top Overlay-No Net" (solid, pour order 3): 180.132,47.672 180.437,47.936 180.741,48.174 180.992,48.458 181.19,48.769 181.296,49.133 181.27,49.411 181.137,49.682 180.833,49.999 180.49,50.224 180.192,50.303 179.709,50.25 179.313,50.012 179.015,49.656 178.797,49.285 178.625,48.875 178.526,48.597 178.334,49.087 178.162,49.496 177.898,50.065 177.554,50.501 177.17,50.819 176.655,50.964 176.377,50.925 175.954,50.753 175.597,50.449 175.438,50.263 175.332,50.078 175.266,49.867 175.227,49.576 175.306,49.166 175.425,48.928 175.61,48.677 175.98,48.306 176.324,48.042 176.853,47.698
no net on Top Overlay "Bottom Layer-No Net" (solid, pour order 12): 70.5,27.45 70.474,27.424 70.474,23.35 186.336,23.35 186.35,23.364 186.35,27.475
no net on Top Overlay "Top Overlay-No Net" (solid, pour order 2): 89.632,47.697 89.937,47.961 90.241,48.199 90.492,48.483 90.69,48.794 90.796,49.158 90.77,49.436 90.637,49.707 90.333,50.024 89.99,50.249 89.692,50.328 89.209,50.275 88.813,50.037 88.515,49.681 88.297,49.31 88.125,48.9 88.026,48.622 87.834,49.112 87.662,49.522 87.398,50.09 87.054,50.526 86.67,50.844 86.155,50.989 85.877,50.95 85.454,50.778 85.097,50.474 84.938,50.288 84.832,50.103 84.766,49.892 84.727,49.601 84.806,49.191 84.925,48.953 85.11,48.702 85.48,48.331 85.824,48.067 86.353,47.723
no net on Top Overlay "Top Overlay-No Net" (solid, pour order 1): 149.157,51.447 149.462,51.711 149.766,51.949 150.017,52.233 150.215,52.544 150.321,52.908 150.295,53.186 150.162,53.457 149.858,53.774 149.515,53.999 149.217,54.078 148.734,54.025 148.338,53.787 148.04,53.431 147.822,53.06 147.65,52.65 147.551,52.372 147.359,52.862 147.187,53.272 146.923,53.84 146.579,54.276 146.195,54.594 145.68,54.739 145.402,54.7 144.979,54.528 144.622,54.224 144.463,54.038 144.357,53.853 144.291,53.642 144.252,53.351 144.331,52.941 144.45,52.703 144.635,52.452 145.005,52.081 145.349,51.817 145.878,51.473
no net on Top Overlay "snow_5" (solid, pour order 11): 173.037,81.952 174.144,80.807 175.414,78.902 178.716,74.838 184.685,68.615 186.209,66.456 186.336,65.694 186.336,64.678 186.082,63.789 185.447,63.281 184.685,63.027 181.51,63.027 176.049,64.551 172.874,65.313 171.223,65.567 169.064,65.313 165.762,63.916 162.46,61.757 157.38,59.725 154.205,59.725 147.601,61.376 144.934,61.757 141.759,61.884 138.584,60.868 137.568,60.106 133.377,58.48 130.284,58.237 125.221,59.025 119.026,60.741 116.613,61.122 113.819,61.122 112.168,60.868 110.009,60.106 106.326,59.344 101.754,59.344 99.468,59.852 97.436,60.741 95.658,62.265 93.499,63.408 90.705,64.424 88.673,64.805 85.244,64.805 82.45,63.789 79.275,62.392 77.243,62.138 75.211,62.392 73.814,63.027 72.671,63.789 72.29,65.059 72.417,66.075 72.798,66.837 75.211,68.869 78.767,72.298 82.323,76.362 85.879,81.061 87.911,83.982 128.703,94.345
no net on Top Overlay "snow_1" (solid, pour order 7): 130.075,182.28 131.218,180.883 132.742,178.47 134.647,173.835 137.06,168.437 142.14,160.309 148.871,152.181 149.76,150.149 149.76,147.355 149.252,145.704 134.816,127.659 105.691,143.545 105.31,144.688 105.564,145.958 107.85,149.006 113.438,156.245 117.756,161.833 121.122,168.564 122.328,171.104 125.249,178.597 126.265,180.248 127.281,181.518 128.17,182.28
no net on Top Overlay "snow_4" (solid, pour order 10): 166.016,103.667 168.302,99.095 170.08,96.174 173.382,91.602 176.176,88.681 177.827,87.284 179.097,85.887 179.478,85.252 179.351,82.966 178.716,82.712 174.208,82.649 173.636,82.712 173.128,82.331 173.128,81.95 87.911,83.982 87.149,84.49 84.99,84.744 83.847,85.506 83.72,87.03 85.244,89.316 86.514,90.205 92.356,96.809 96.039,103.032 123.573,109.357
no net on Top Overlay "snow_3" (solid, pour order 9): 158.269,121.701 158.396,121.066 159.539,118.018 160.428,115.986 161.571,114.462 162.46,112.938 164.746,110.144 167.667,107.731 169.699,105.953 170.08,105.445 170.207,104.937 169.953,104.429 169.064,104.048 166.397,104.048 166.016,103.667 96.039,103.032 95.531,103.413 92.737,104.302 91.467,104.937 90.705,106.08 91.086,107.604 95.404,111.795 98.198,115.732 101.627,121.828 121.617,131.505
no net on Top Overlay "snow_2" (solid, pour order 8): 148.236,144.434 150.141,140.878 152.122,137.551 152.3,137.322 152.935,136.306 153.824,135.036 157.253,131.226 161.825,126.527 163.095,125.003 163.222,123.733 162.841,123.352 162.079,122.844 160.555,122.082 158.904,122.336 158.523,121.701 158.269,121.701 101.627,121.828 101.373,122.336 99.976,122.844 98.198,123.352 97.563,124.495 97.309,125.892 97.436,126.527 100.281,130.058 102.897,133.258 106.199,138.084 108.485,142.275
GND on Top Layer "TOP_GND" (solid, remove dead copper, pour order 0): 77.693,187.488 213.63,188.119 190.386,14.625 53.51,14.625
GND on Bottom Layer "Top Layer-GND" (solid, remove dead copper, pour order 11): 77.693,187.488 213.63,188.119 191.035,19.466 70.512,19.466 54.383,20.863

## Keep-outs
Keep-Out Layer:
  lines w0.2: 70.474,23.35 70.574,37.5 81.25,37.5 81.25,47.716 86.35,47.716 85.925,48.075 85.475,48.35 85.1,48.675 84.85,49.075 84.7,49.5 84.8,50.2 85.1,50.525 85.525,50.825 86,50.975 86.4,50.95 86.75,50.75 87.125,50.45 87.4,50.05 87.725,49.425 88.05,48.675 88.275,49.225 88.5,49.625 88.8,50 89.1,50.25 89.725,50.35 90.025,50.225 90.375,50 90.575,49.75 90.775,49.475 90.8,49.125 90.7,48.775 90.425,48.4 90.05,48.05 89.675,47.716 95,47.716 95,37.5 99.468,37.5 99.468,52.923 106.5,52.923 106.4,53.05 106.1,53.2 105.825,53.475 105.575,53.65 105.275,53.975 105.075,54.325 104.975,54.7 105,55.05 105.075,55.35 105.2,55.65 105.45,55.925 105.725,56.1 106.025,56.275 106.45,56.325 106.975,56.175 107.3,56.075 107.55,55.825 107.775,55.425 107.975,55.15 108.15,54.725 108.4,54.125 108.575,54.5 108.75,54.775 108.925,55.15 109.2,55.45 109.55,55.625 110.15,55.675 110.65,55.475 111.025,55.125 111.2,54.875 111.25,54.425 111.2,54.175 111.05,53.825 110.675,53.4 110.15,52.923 116.5,52.924 116.5,37.5 119.026,37.5 119.026,60.741 116.613,61.122 113.819,61.122 112.168,60.868 110.009,60.106 107.723,59.598 106.326,59.344 101.754,59.344 99.468,59.852 97.436,60.741 95.658,62.265 93.499,63.408 90.705,64.424 88.673,64.805 85.244,64.805 82.45,63.789 80.799,63.027 79.275,62.392 77.243,62.138 75.211,62.392 73.814,63.027 72.671,63.789 72.29,65.059 72.417,66.075 72.798,66.837 75.211,68.869 78.767,72.298 82.323,76.362 85.879,81.061 87.911,83.982 87.149,84.49 84.99,84.744 83.847,85.506 83.72,87.03 85.244,89.316 86.514,90.205 88.8,92.872 92.356,96.809 96.039,103.032 95.531,103.413 92.737,104.302 91.467,104.937 90.705,106.08 91.086,107.604 95.404,111.795 98.198,115.732 101.627,121.828 101.373,122.336 99.976,122.844 98.198,123.352 97.563,124.495 97.309,125.892 97.436,126.527 102.897,133.258 106.199,138.084 108.485,142.275 107.088,142.783 105.691,143.545 105.31,144.688 105.564,145.958 107.85,149.006 110.644,152.562 113.438,156.245 117.756,161.833 119.915,166.024 122.328,171.104 125.249,178.597 126.265,180.248 127.281,181.518 128.17,182.28 129.186,182.407 130.075,182.28 131.218,180.883 132.742,178.47 134.012,175.295 135.282,172.374 137.06,168.437 140.108,163.484 142.14,160.309 144.68,157.261 147.728,153.705 148.871,152.181 149.506,150.911 149.76,150.149 149.76,147.355 149.252,145.704 148.363,144.688 148.236,144.434 148.744,143.418 150.141,140.878 151.665,138.338 152.935,136.306 153.824,135.036 157.253,131.226 161.825,126.527 163.095,125.003 163.222,124.368 163.222,123.733 162.841,123.352 162.333,122.971 160.555,122.082 158.904,122.336 158.523,121.701 158.269,121.701 158.396,121.066 159.539,118.018 160.428,115.986 161.571,114.462 162.46,112.938 164.746,110.144 167.667,107.731 169.699,105.953 170.08,105.445 170.207,104.937 169.953,104.429 169.064,104.048 166.397,104.048 166.016,103.667 166.397,103.032 167.413,101 168.302,99.095 169.191,97.698 170.08,96.174 171.35,94.396 173.382,91.602 174.779,90.205 176.176,88.681 177.827,87.284 179.097,85.887 179.478,85.252 179.478,83.982 179.351,82.966 178.716,82.712 177.319,82.585 174.779,82.585 173.636,82.712 173.128,82.331 173.128,81.95 174.144,80.807 175.414,78.902 177.192,76.743 178.716,74.838 181.891,71.536 184.685,68.615 185.574,67.345 186.209,66.456 186.336,65.694 186.336,64.678 186.082,63.789 185.447,63.281 184.685,63.027 181.51,63.027 176.049,64.551 172.874,65.313 171.223,65.567 169.064,65.313 165.762,63.916 162.46,61.757 157.38,59.725 154.205,59.725 147.601,61.376 144.934,61.757 141.759,61.884 138.584,60.868 137.568,60.106 137.568,58.455 137.695,37.5 141.25,37.5 141.25,51.466 145.85,51.466 145.075,52 144.675,52.4 144.35,52.8 144.25,53.25 144.3,53.725 144.45,54.1 144.7,54.35 145,54.55 145.325,54.675 145.675,54.75 146.225,54.6 146.575,54.25 146.8,54 146.975,53.775 147.225,53.225 147.55,52.4 147.875,53.15 148.1,53.5 148.325,53.8 148.75,54.05 149.225,54.075 149.55,53.975 149.875,53.775 150.125,53.475 150.275,53.25 150.325,52.9 150.1,52.325 149.65,51.85 149.175,51.466 153.5,51.466 153.5,37.5 158.75,37.5 158.75,49.716 162.55,49.716 162.175,49.975 161.825,50.225 161.55,50.475 161.275,50.775 161.05,51.125 161,51.525 161.025,51.8 161.125,52.1 161.35,52.4 161.675,52.675 161.975,52.85 162.35,52.925 162.9,52.8 163.2,52.575 163.55,52.225 163.8,51.85 164,51.25 164.3,50.55 164.35,50.775 164.475,51.1 164.675,51.425 164.85,51.7 165.025,51.9 165.3,52.15 165.85,52.3 166.225,52.225 166.5,52.05 166.8,51.8 166.975,51.55 167.1,51.15 167.025,50.875 166.8,50.425 166.425,50.05 165.975,49.716 169.5,49.716 169.5,37.5 173.75,37.5 173.75,47.716 176.825,47.716 176.275,48.025 175.925,48.35 175.6,48.675 175.35,49.05 175.25,49.55 175.275,49.875 175.375,50.175 175.575,50.425 175.9,50.75 176.3,50.875 176.7,50.95 177.075,50.85 177.45,50.6 177.75,50.275 178.15,49.55 178.525,48.6 178.825,49.3 179,49.625 179.3,50.025 179.625,50.225 179.925,50.3 180.275,50.275 180.65,50.125 180.975,49.9 181.25,49.55 181.325,49.225 181.2,48.8 180.975,48.45 180.65,48.1 180.2,47.716 183,47.716 183,37.5 186.336,37.5 186.336,23.35 159.3,23.35 159.3,26.375 157.35,26.375 157.35,23.35 101.35,23.35 101.35,26.375 99.4,26.375 99.4,23.35 70.474,23.35 ; 84.1,27.35 86.05,27.35 86.05,30.375 84.1,30.375 84.1,27.35 ; 92.45,75.641 94.05,75.641 94.05,79.091 92.45,79.091 92.45,75.641 ; 105.35,96.441 106.95,96.441 106.95,99.891 105.35,99.891 105.35,96.441 ; 111.55,113.941 113.15,113.941 113.15,117.391 111.55,117.391 111.55,113.941 ; 113.6,70.541 115.2,70.541 115.2,73.991 113.6,73.991 113.6,70.541 ; 119.05,133.041 120.65,133.041 120.65,136.491 119.05,136.491 119.05,133.041 ; 128.65,156.041 130.25,156.041 130.25,159.491 128.65,159.491 128.65,156.041 ; 130.1,100.441 131.7,100.441 131.7,103.891 130.1,103.891 130.1,100.441 ; 135.65,76.341 137.25,76.341 137.25,79.791 135.65,79.791 135.65,76.341 ; 138.3,132.941 139.9,132.941 139.9,136.391 138.3,136.391 138.3,132.941 ; 147.4,112.841 149,112.841 149,116.291 147.4,116.291 147.4,112.841 ; 155.15,92.441 156.75,92.441 156.75,95.891 155.15,95.891 155.15,92.441 ; 163.4,73.941 165,73.941 165,77.391 163.4,77.391 163.4,73.941 ; 170.675,27.35 172.625,27.35 172.625,30.375 170.675,30.375 170.675,27.35

## Silkscreen, mask and mechanical layers (free items; w line width, h text height)
Top Overlay:
  drawing of 259 lines, arcs and shapes, not listed
Mechanical 1:
  drawing of 418 lines, arcs and shapes, not listed
Mechanical 15:
  pour cut-out: 174.091,53.44

## Text inside footprints (layer, text, board x,y; h text height)
J1: Mechanical 13 "PCB END" at 183.6,40.516 h0.5 r90
U3: Top Overlay "*" at 143.836,47.045 h1.27; Mechanical 13 "*" at 145.157,46.073 h1.27